# Altium PCB PCB3.PcbDoc (part 4 of 4)
Units mm, origin at the board's own origin, x right, y up, seen from the top; angles counter-clockwise.
Board outline 130 x 71 mm, 4 copper layers (Top Layer, Mid Layer 1, Mid Layer 2, Bottom Layer), stack 1.57 mm thick; 325 components, 359 nets, 1545 pads, 1046 vias.
Unrouted connection lines stored in the file: 158.
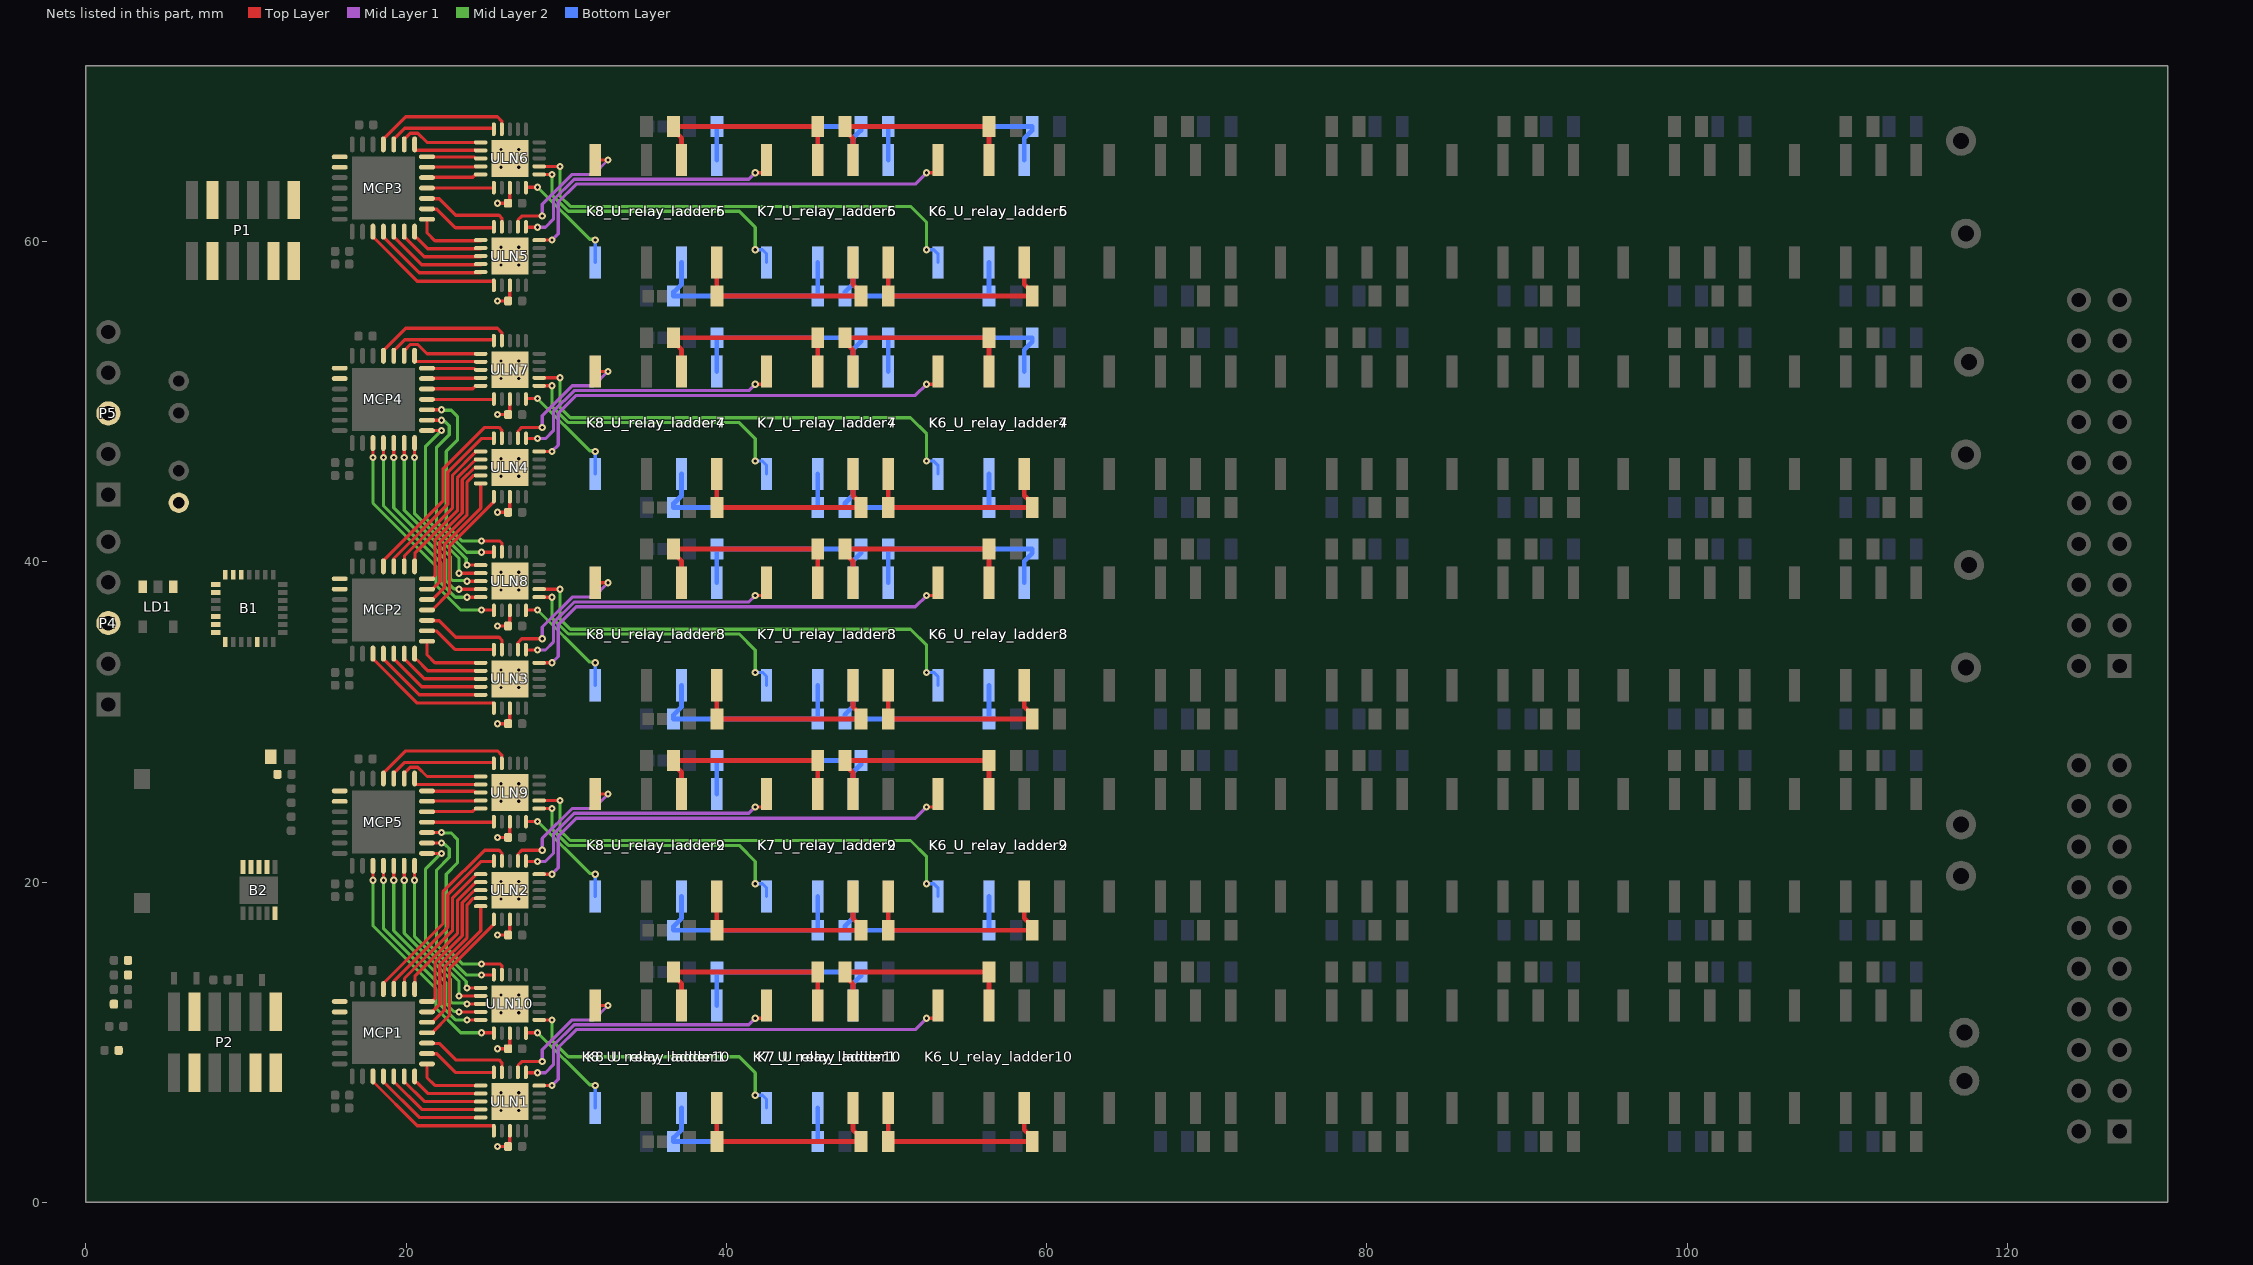
[diagram p6: the nets of this part, all layers, seen from the top]

## Via types
v1: diameter 0.45, hole 0.2, Top Layer to Bottom Layer, 944 vias
v2: diameter 0.5, hole 0.2, Top Layer to Bottom Layer, 85 vias
v3: diameter 0.5, hole 0.25, Top Layer to Bottom Layer, 10 vias
v4: diameter 0.8, hole 0.4, Top Layer to Bottom Layer, 5 vias
v5: diameter 5.5, hole 3, Top Layer to Bottom Layer, 2 vias

## Nets (pads, with @x,y where several pads share a name; then routed paths per layer and width w, separated by ;. In a path a pad name is that pad's centre, name@x,y a point inside that pad or via, vN(x,y) a via of type N, cw(c..) or ccw(c..) an arc to the next point about the centre after c; other vN are vias at no path point) (continued)
NetK6_U_relay_ladder2_7: K6_U_relay_ladder2.7 K7_U_relay_ladder2.6 R18_U_relay_ladder2.2 R19_U_relay_ladder2.1 | length 13.4
  Bottom Layer w0.3: K7_U_relay_ladder2.6@47.9,19.1 47.9,17.75 47.4,17.25 R19_U_relay_ladder2.1@47.4,17 56.4,17 56.402,17.001 56.402,19.098 K6_U_relay_ladder2.7@56.403,19.1
NetK6_U_relay_ladder2_8: K6_U_relay_ladder2.8 ULN9.12 | length 29.8
  Top Layer w0.2: ULN9.12@28.3,25.1 v1(29.6,25.1)
  Mid Layer 2 w0.2: v1(29.6,25.1) 29.6,23.253 30.251,22.602 51.494,22.602 52.5,21.596 v1(52.5,19.9)
  Bottom Layer w0.2: v1(52.5,19.9) 52.953,19.9 53.203,19.65 K6_U_relay_ladder2.8@53.203,19.1
NetK6_U_relay_ladder3_3: K6_U_relay_ladder3.3 K7_U_relay_ladder3.4 R10_U_relay_ladder3.2 R11_U_relay_ladder3.1 | length 13.4
  Bottom Layer w0.3: K7_U_relay_ladder3.4@50.098,38.7 50.099,38.701 R11_U_relay_ladder3.1@50.1,40.8 R11_U_relay_ladder3.1@50.1,40.8 59.1,40.8 59.1,40.55 58.6,40.05 K6_U_relay_ladder3.3@58.6,38.7
NetK6_U_relay_ladder3_7: K6_U_relay_ladder3.7 K7_U_relay_ladder3.6 R18_U_relay_ladder3.2 R19_U_relay_ladder3.1 | length 13.4
  Bottom Layer w0.3: K7_U_relay_ladder3.6@47.9,32.3 47.9,30.95 47.4,30.45 R19_U_relay_ladder3.1@47.4,30.2 56.4,30.2 56.402,30.201 56.402,32.298 K6_U_relay_ladder3.7@56.403,32.3
NetK6_U_relay_ladder3_8: K6_U_relay_ladder3.8 ULN8.12 | length 29.8
  Top Layer w0.2: ULN8.12@28.3,38.3 v1(29.6,38.3)
  Mid Layer 2 w0.2: v1(29.6,38.3) 29.6,36.453 30.251,35.802 51.494,35.802 52.5,34.796 v1(52.5,33.1)
  Bottom Layer w0.2: v1(52.5,33.1) 52.953,33.1 53.203,32.85 K6_U_relay_ladder3.8@53.203,32.3
NetK6_U_relay_ladder4_3: K6_U_relay_ladder4.3 K7_U_relay_ladder4.4 R10_U_relay_ladder4.2 R11_U_relay_ladder4.1 | length 13.4
  Bottom Layer w0.3: K7_U_relay_ladder4.4@50.097,51.9 50.099,51.901 50.099,53.998 R11_U_relay_ladder4.1@50.1,54 59.1,54 59.1,53.75 58.6,53.25 K6_U_relay_ladder4.3@58.6,51.9
NetK6_U_relay_ladder4_7: K6_U_relay_ladder4.7 K7_U_relay_ladder4.6 R18_U_relay_ladder4.2 R19_U_relay_ladder4.1 | length 13.4
  Bottom Layer w0.3: K7_U_relay_ladder4.6@47.9,45.5 47.9,44.15 47.4,43.65 R19_U_relay_ladder4.1@47.4,43.4 56.4,43.4 56.402,43.401 56.402,45.498 K6_U_relay_ladder4.7@56.403,45.5
NetK6_U_relay_ladder4_8: K6_U_relay_ladder4.8 ULN7.12 | length 29.8
  Top Layer w0.2: ULN7.12@28.3,51.5 v1(29.6,51.5)
  Mid Layer 2 w0.2: v1(29.6,51.5) 29.6,49.653 30.251,49.002 51.494,49.002 52.5,47.996 v1(52.5,46.3)
  Bottom Layer w0.2: v1(52.5,46.3) 52.953,46.3 53.203,46.05 K6_U_relay_ladder4.8@53.203,45.5
NetK6_U_relay_ladder5_3: K6_U_relay_ladder5.3 K7_U_relay_ladder5.4 R10_U_relay_ladder5.2 R11_U_relay_ladder5.1 | length 13.4
  Bottom Layer w0.3: K7_U_relay_ladder5.4@50.097,65.1 50.099,65.101 50.099,67.198 R11_U_relay_ladder5.1@50.1,67.2 59.1,67.2 59.1,66.95 58.6,66.45 K6_U_relay_ladder5.3@58.6,65.1
NetK6_U_relay_ladder5_7: K6_U_relay_ladder5.7 K7_U_relay_ladder5.6 R18_U_relay_ladder5.2 R19_U_relay_ladder5.1 | length 13.4
  Bottom Layer w0.3: K7_U_relay_ladder5.6@47.9,58.7 47.9,57.35 47.4,56.85 R19_U_relay_ladder5.1@47.4,56.6 56.4,56.6 56.402,56.601 56.402,58.698 K6_U_relay_ladder5.7@56.403,58.7
NetK6_U_relay_ladder5_8: K6_U_relay_ladder5.8 ULN6.12 | length 29.8
  Top Layer w0.2: ULN6.12@28.3,64.7 v1(29.6,64.7)
  Mid Layer 2 w0.2: v1(29.6,64.7) 29.6,62.853 30.251,62.202 51.494,62.202 52.5,61.196 v1(52.5,59.5)
  Bottom Layer w0.2: v1(52.5,59.5) 52.953,59.5 53.203,59.25 K6_U_relay_ladder5.8@53.203,58.7
NetK6_U_relay_ladder6_3: K6_U_relay_ladder6.3 K7_U_relay_ladder6.4 R10_U_relay_ladder6.2 R11_U_relay_ladder6.1 | length 13.4
  Top Layer w0.3: K7_U_relay_ladder6.4@50.097,58.7 50.099,58.698 R11_U_relay_ladder6.1@50.1,56.6 R11_U_relay_ladder6.1@50.1,56.6 59.1,56.6 59.1,56.85 58.6,57.35 K6_U_relay_ladder6.3@58.6,58.7
NetK6_U_relay_ladder6_7: K6_U_relay_ladder6.7 K7_U_relay_ladder6.6 R18_U_relay_ladder6.2 R19_U_relay_ladder6.1 | length 13.4
  Top Layer w0.3: K7_U_relay_ladder6.6@47.9,65.1 47.9,66.45 47.4,66.95 R19_U_relay_ladder6.1@47.4,67.2 56.4,67.2 56.402,67.198 56.402,65.102 K6_U_relay_ladder6.7@56.403,65.1
NetK6_U_relay_ladder6_8: K6_U_relay_ladder6.8 ULN5.15 | length 28.5
  Top Layer w0.2: ULN5.15@28.3,60.1 v1(29.1,60.1) ; v1(52.5,64.3) 52.953,64.3 53.203,64.55 K6_U_relay_ladder6.8@53.203,65.1
  Mid Layer 1 w0.2: v1(29.1,60.1) 29.497,60.497 29.497,62.479 30.616,63.598 51.798,63.598 v1(52.5,64.3)
NetK6_U_relay_ladder7_3: K6_U_relay_ladder7.3 K7_U_relay_ladder7.4 R10_U_relay_ladder7.2 R11_U_relay_ladder7.1 | length 13.4
  Top Layer w0.3: K7_U_relay_ladder7.4@50.097,45.5 50.099,45.498 R11_U_relay_ladder7.1@50.1,43.4 R11_U_relay_ladder7.1@50.1,43.4 59.1,43.4 59.1,43.65 58.6,44.15 K6_U_relay_ladder7.3@58.6,45.5
NetK6_U_relay_ladder7_7: K6_U_relay_ladder7.7 K7_U_relay_ladder7.6 R18_U_relay_ladder7.2 R19_U_relay_ladder7.1 | length 13.4
  Top Layer w0.3: K7_U_relay_ladder7.6@47.9,51.9 47.9,53.25 47.4,53.75 R19_U_relay_ladder7.1@47.4,54 56.4,54 56.402,53.998 56.402,51.902 K6_U_relay_ladder7.7@56.403,51.9
NetK6_U_relay_ladder7_8: K6_U_relay_ladder7.8 ULN4.15 | length 28.5
  Top Layer w0.2: ULN4.15@28.3,46.9 v1(29.1,46.9) ; v1(52.5,51.1) 52.953,51.1 53.203,51.35 K6_U_relay_ladder7.8@53.203,51.9
  Mid Layer 1 w0.2: v1(29.1,46.9) 29.497,47.297 29.497,49.279 30.616,50.398 51.798,50.398 v1(52.5,51.1)
NetK6_U_relay_ladder8_3: K6_U_relay_ladder8.3 K7_U_relay_ladder8.4 R10_U_relay_ladder8.2 R11_U_relay_ladder8.1 | length 13.4
  Top Layer w0.3: K7_U_relay_ladder8.4@50.097,32.3 50.099,32.298 50.099,30.202 R11_U_relay_ladder8.1@50.1,30.2 59.1,30.2 59.1,30.45 58.6,30.95 K6_U_relay_ladder8.3@58.6,32.3
NetK6_U_relay_ladder8_7: K6_U_relay_ladder8.7 K7_U_relay_ladder8.6 R18_U_relay_ladder8.2 R19_U_relay_ladder8.1 | length 13.4
  Top Layer w0.3: K7_U_relay_ladder8.6@47.9,38.7 47.9,40.05 47.4,40.55 R19_U_relay_ladder8.1@47.4,40.8 56.4,40.8 56.402,40.798 56.402,38.702 K6_U_relay_ladder8.7@56.403,38.7
NetK6_U_relay_ladder8_8: K6_U_relay_ladder8.8 ULN3.15 | length 28.5
  Top Layer w0.2: ULN3.15@28.3,33.7 v1(29.1,33.7) ; v1(52.5,37.9) 52.953,37.9 53.203,38.15 K6_U_relay_ladder8.8@53.203,38.7
  Mid Layer 1 w0.2: v1(29.1,33.7) 29.497,34.097 29.497,36.079 30.616,37.198 51.798,37.198 v1(52.5,37.9)
NetK6_U_relay_ladder9_3: K6_U_relay_ladder9.3 K7_U_relay_ladder9.4 R10_U_relay_ladder9.2 R11_U_relay_ladder9.1 | length 13.4
  Top Layer w0.3: K7_U_relay_ladder9.4@50.097,19.1 50.099,19.098 50.099,17.002 R11_U_relay_ladder9.1@50.1,17 59.1,17 59.1,17.25 58.6,17.75 K6_U_relay_ladder9.3@58.6,19.1
NetK6_U_relay_ladder9_7: K6_U_relay_ladder9.7 K7_U_relay_ladder9.6 R18_U_relay_ladder9.2 R19_U_relay_ladder9.1 | length 13.4
  Top Layer w0.3: K7_U_relay_ladder9.6@47.9,25.5 47.9,26.85 47.4,27.35 R19_U_relay_ladder9.1@47.4,27.6 56.4,27.6 56.402,27.598 56.402,25.502 K6_U_relay_ladder9.7@56.403,25.5
NetK6_U_relay_ladder9_8: K6_U_relay_ladder9.8 ULN2.15 | length 28.5
  Top Layer w0.2: ULN2.15@28.3,20.5 v1(29.1,20.5) ; v1(52.5,24.7) 52.953,24.7 53.203,24.95 K6_U_relay_ladder9.8@53.203,25.5
  Mid Layer 1 w0.2: v1(29.1,20.5) 29.497,20.897 29.497,22.879 30.616,23.998 51.798,23.998 v1(52.5,24.7)
NetK6_U_relay_ladder10_3: K6_U_relay_ladder10.3 K7_U_relay_ladder10.4 R10_U_relay_ladder10.2 R11_U_relay_ladder10.1 | length 13.4
  Top Layer w0.3: K7_U_relay_ladder10.4@50.097,5.9 50.099,5.898 50.099,3.802 R11_U_relay_ladder10.1@50.1,3.8 59.1,3.8 59.1,4.05 58.6,4.55 K6_U_relay_ladder10.3@58.6,5.9
NetK6_U_relay_ladder10_7: K6_U_relay_ladder10.7 K7_U_relay_ladder10.6 R18_U_relay_ladder10.2 R19_U_relay_ladder10.1 | length 13.4
  Top Layer w0.3: K7_U_relay_ladder10.6@47.9,12.3 47.9,13.65 47.4,14.15 47.4,14.4 56.4,14.4 56.402,14.398 56.402,12.302 K6_U_relay_ladder10.7@56.403,12.3
NetK6_U_relay_ladder10_8: K6_U_relay_ladder10.8 ULN1.15 | length 28.5
  Top Layer w0.2: ULN1.15@28.3,7.3 v1(29.1,7.3) ; v1(52.5,11.5) 52.953,11.5 53.203,11.75 K6_U_relay_ladder10.8@53.203,12.3
  Mid Layer 1 w0.2: v1(29.1,7.3) 29.497,7.697 29.497,9.679 30.616,10.798 51.798,10.798 v1(52.5,11.5)
NetK7_U_relay_ladder1_3: K7_U_relay_ladder1.3 K8_U_relay_ladder1.4 R11_U_relay_ladder1.2 R12_U_relay_ladder1.1 | length 13.4
  Bottom Layer w0.3: K8_U_relay_ladder1.4@39.397,12.3 K8_U_relay_ladder1.4@39.397,12.3 39.399,14.398 39.4,14.4 48.4,14.4 48.4,14.15 47.9,13.65 K7_U_relay_ladder1.3@47.9,12.3
NetK7_U_relay_ladder1_7: K7_U_relay_ladder1.7 K8_U_relay_ladder1.6 R19_U_relay_ladder1.2 R20_U_relay_ladder1.1 | length 13.4
  Bottom Layer w0.3: K8_U_relay_ladder1.6@37.2,5.9 37.2,4.55 36.7,4.05 R20_U_relay_ladder1.1@36.7,3.8 R19_U_relay_ladder1.2@45.7,3.8 45.702,3.801 45.702,5.898 K7_U_relay_ladder1.7@45.703,5.9
NetK7_U_relay_ladder1_8: K7_U_relay_ladder1.8 ULN10.11 | length 18.4
  Top Layer w0.2: ULN10.11@28.3,11.4 v1(29.1,11.4)
  Mid Layer 2 w0.2: v1(29.1,11.4) 29.1,10.127 30.127,9.1 40.794,9.1 41.8,8.094 v1(41.8,6.7)
  Bottom Layer w0.2: v1(41.8,6.7) 42.253,6.7 42.503,6.45 K7_U_relay_ladder1.8@42.503,5.9
NetK7_U_relay_ladder2_3: K7_U_relay_ladder2.3 K8_U_relay_ladder2.4 R11_U_relay_ladder2.2 R12_U_relay_ladder2.1 | length 13.4
  Bottom Layer w0.3: K8_U_relay_ladder2.4@39.397,25.5 K8_U_relay_ladder2.4@39.397,25.5 39.399,27.598 R12_U_relay_ladder2.1@39.4,27.6 R11_U_relay_ladder2.2@48.4,27.6 48.4,27.35 47.9,26.85 K7_U_relay_ladder2.3@47.9,25.5
NetK7_U_relay_ladder2_7: K7_U_relay_ladder2.7 K8_U_relay_ladder2.6 R19_U_relay_ladder2.2 R20_U_relay_ladder2.1 | length 13.4
  Bottom Layer w0.3: K8_U_relay_ladder2.6@37.2,19.1 37.2,17.75 36.7,17.25 R20_U_relay_ladder2.1@36.7,17 R19_U_relay_ladder2.2@45.7,17 45.702,17.001 45.702,19.098 K7_U_relay_ladder2.7@45.703,19.1
NetK7_U_relay_ladder2_8: K7_U_relay_ladder2.8 ULN9.11 | length 18.4
  Top Layer w0.2: ULN9.11@28.3,24.6 v1(29.1,24.6)
  Mid Layer 2 w0.2: v1(29.1,24.6) 29.1,23.327 30.127,22.3 40.794,22.3 41.8,21.294 v1(41.8,19.9)
  Bottom Layer w0.2: v1(41.8,19.9) 42.253,19.9 42.503,19.65 K7_U_relay_ladder2.8@42.503,19.1
NetK7_U_relay_ladder3_3: K7_U_relay_ladder3.3 K8_U_relay_ladder3.4 R11_U_relay_ladder3.2 R12_U_relay_ladder3.1 | length 13.4
  Bottom Layer w0.3: K8_U_relay_ladder3.4@39.398,38.7 K8_U_relay_ladder3.4@39.397,38.7 39.399,40.798 R12_U_relay_ladder3.1@39.4,40.8 R11_U_relay_ladder3.2@48.4,40.8 48.4,40.55 47.9,40.05 K7_U_relay_ladder3.3@47.9,38.7
NetK7_U_relay_ladder3_7: K7_U_relay_ladder3.7 K8_U_relay_ladder3.6 R19_U_relay_ladder3.2 R20_U_relay_ladder3.1 | length 13.4
  Bottom Layer w0.3: K8_U_relay_ladder3.6@37.2,32.3 37.2,30.95 36.7,30.45 R20_U_relay_ladder3.1@36.7,30.2 R19_U_relay_ladder3.2@45.7,30.2 45.702,30.201 45.702,32.298 K7_U_relay_ladder3.7@45.703,32.3
NetK7_U_relay_ladder3_8: K7_U_relay_ladder3.8 ULN8.11 | length 18.4
  Top Layer w0.2: ULN8.11@28.3,37.8 v1(29.1,37.8)
  Mid Layer 2 w0.2: v1(29.1,37.8) 29.1,36.527 30.127,35.5 40.794,35.5 41.8,34.494 v1(41.8,33.1)
  Bottom Layer w0.2: v1(41.8,33.1) 42.253,33.1 42.503,32.85 K7_U_relay_ladder3.8@42.503,32.3
NetK7_U_relay_ladder4_3: K7_U_relay_ladder4.3 K8_U_relay_ladder4.4 R11_U_relay_ladder4.2 R12_U_relay_ladder4.1 | length 13.4
  Bottom Layer w0.3: K8_U_relay_ladder4.4@39.397,51.9 39.399,51.901 39.399,53.998 R12_U_relay_ladder4.1@39.4,54 R11_U_relay_ladder4.2@48.4,54 48.4,53.75 47.9,53.25 K7_U_relay_ladder4.3@47.9,51.9
NetK7_U_relay_ladder4_7: K7_U_relay_ladder4.7 K8_U_relay_ladder4.6 R19_U_relay_ladder4.2 R20_U_relay_ladder4.1 | length 13.4
  Bottom Layer w0.3: K8_U_relay_ladder4.6@37.2,45.5 37.2,44.15 36.7,43.65 R20_U_relay_ladder4.1@36.7,43.4 R19_U_relay_ladder4.2@45.7,43.4 45.702,43.401 K7_U_relay_ladder4.7@45.703,45.5 K7_U_relay_ladder4.7@45.703,45.5
NetK7_U_relay_ladder4_8: K7_U_relay_ladder4.8 ULN7.11 | length 18.4
  Top Layer w0.2: ULN7.11@28.3,51 v1(29.1,51)
  Mid Layer 2 w0.2: v1(29.1,51) 29.1,49.727 30.127,48.7 40.794,48.7 41.8,47.694 v1(41.8,46.3)
  Bottom Layer w0.2: v1(41.8,46.3) 42.253,46.3 42.503,46.05 K7_U_relay_ladder4.8@42.503,45.5
NetK7_U_relay_ladder5_3: K7_U_relay_ladder5.3 K8_U_relay_ladder5.4 R11_U_relay_ladder5.2 R12_U_relay_ladder5.1 | length 13.4
  Bottom Layer w0.3: K8_U_relay_ladder5.4@39.397,65.1 39.399,65.101 39.399,67.198 R12_U_relay_ladder5.1@39.4,67.2 R11_U_relay_ladder5.2@48.4,67.2 48.4,66.95 47.9,66.45 K7_U_relay_ladder5.3@47.9,65.1
NetK7_U_relay_ladder5_7: K7_U_relay_ladder5.7 K8_U_relay_ladder5.6 R19_U_relay_ladder5.2 R20_U_relay_ladder5.1 | length 13.4
  Bottom Layer w0.3: K8_U_relay_ladder5.6@37.2,58.7 37.2,57.35 36.7,56.85 R20_U_relay_ladder5.1@36.7,56.6 R19_U_relay_ladder5.2@45.7,56.6 45.702,56.601 K7_U_relay_ladder5.7@45.703,58.7 K7_U_relay_ladder5.7@45.703,58.7
NetK7_U_relay_ladder5_8: K7_U_relay_ladder5.8 ULN6.11 | length 18.4
  Top Layer w0.2: ULN6.11@28.3,64.2 v1(29.1,64.2)
  Mid Layer 2 w0.2: v1(29.1,64.2) 29.1,62.927 30.127,61.9 40.794,61.9 41.8,60.894 v1(41.8,59.5)
  Bottom Layer w0.2: v1(41.8,59.5) 42.253,59.5 42.503,59.25 K7_U_relay_ladder5.8@42.503,58.7
NetK7_U_relay_ladder6_3: K7_U_relay_ladder6.3 K8_U_relay_ladder6.4 R11_U_relay_ladder6.2 R12_U_relay_ladder6.1 | length 13.4
  Top Layer w0.3: K8_U_relay_ladder6.4@39.397,58.7 K8_U_relay_ladder6.4@39.397,58.7 39.399,56.602 R12_U_relay_ladder6.1@39.4,56.6 R11_U_relay_ladder6.2@48.4,56.6 48.4,56.85 47.9,57.35 K7_U_relay_ladder6.3@47.9,58.7
NetK7_U_relay_ladder6_7: K7_U_relay_ladder6.7 K8_U_relay_ladder6.6 R19_U_relay_ladder6.2 R20_U_relay_ladder6.1 | length 13.4
  Top Layer w0.3: K8_U_relay_ladder6.6@37.2,65.1 37.2,66.45 36.7,66.95 R20_U_relay_ladder6.1@36.7,67.2 R19_U_relay_ladder6.2@45.7,67.2 45.702,67.198 45.702,65.102 K7_U_relay_ladder6.7@45.703,65.1
NetK7_U_relay_ladder6_8: K7_U_relay_ladder6.8 ULN5.16 | length 17.8
  Top Layer w0.2: ULN5.16@27.475,60.925 ULN5.16@27.475,60.925 27.498,60.9 v1(28.2,60.9) ; v1(41.8,64.3) 42.253,64.3 42.503,64.55 K7_U_relay_ladder6.8@42.503,65.1
  Mid Layer 1 w0.2: v1(28.2,60.9) 28.7,60.9 29.195,61.395 29.195,62.604 30.491,63.9 41.4,63.9 v1(41.8,64.3)
NetK7_U_relay_ladder7_3: K7_U_relay_ladder7.3 K8_U_relay_ladder7.4 R11_U_relay_ladder7.2 R12_U_relay_ladder7.1 | length 13.4
  Top Layer w0.3: K8_U_relay_ladder7.4@39.397,45.5 K8_U_relay_ladder7.4@39.397,45.5 39.399,43.402 R12_U_relay_ladder7.1@39.4,43.4 R11_U_relay_ladder7.2@48.4,43.4 48.4,43.65 47.9,44.15 K7_U_relay_ladder7.3@47.9,45.5
NetK7_U_relay_ladder7_7: K7_U_relay_ladder7.7 K8_U_relay_ladder7.6 R19_U_relay_ladder7.2 R20_U_relay_ladder7.1 | length 13.4
  Top Layer w0.3: K8_U_relay_ladder7.6@37.2,51.9 37.2,53.25 36.7,53.75 R20_U_relay_ladder7.1@36.7,54 R19_U_relay_ladder7.2@45.7,54 45.702,53.998 45.702,51.902 K7_U_relay_ladder7.7@45.703,51.9
NetK7_U_relay_ladder7_8: K7_U_relay_ladder7.8 ULN4.16 | length 17.8
  Top Layer w0.2: ULN4.16@27.475,47.725 27.475,47.723 27.498,47.7 v1(28.2,47.7) ; v1(41.8,51.1) 42.253,51.1 42.503,51.35 K7_U_relay_ladder7.8@42.503,51.9
  Mid Layer 1 w0.2: v1(28.2,47.7) 28.7,47.7 29.195,48.195 29.195,49.404 30.491,50.7 41.4,50.7 v1(41.8,51.1)
NetK7_U_relay_ladder8_3: K7_U_relay_ladder8.3 K8_U_relay_ladder8.4 R11_U_relay_ladder8.2 R12_U_relay_ladder8.1 | length 13.4
  Top Layer w0.3: K8_U_relay_ladder8.4@39.397,32.3 39.399,32.298 39.399,30.202 R12_U_relay_ladder8.1@39.4,30.2 R11_U_relay_ladder8.2@48.4,30.2 48.4,30.45 47.9,30.95 K7_U_relay_ladder8.3@47.9,32.3
NetK7_U_relay_ladder8_7: K7_U_relay_ladder8.7 K8_U_relay_ladder8.6 R19_U_relay_ladder8.2 R20_U_relay_ladder8.1 | length 13.4
  Top Layer w0.3: K8_U_relay_ladder8.6@37.2,38.7 37.2,40.05 36.7,40.55 R20_U_relay_ladder8.1@36.7,40.8 R19_U_relay_ladder8.2@45.7,40.8 45.702,40.798 K7_U_relay_ladder8.7@45.703,38.7 K7_U_relay_ladder8.7@45.703,38.7
NetK7_U_relay_ladder8_8: K7_U_relay_ladder8.8 ULN3.16 | length 17.8
  Top Layer w0.2: ULN3.16@27.475,34.525 27.475,34.523 27.498,34.5 v1(28.2,34.5) ; v1(41.8,37.9) 42.253,37.9 42.503,38.15 K7_U_relay_ladder8.8@42.503,38.7
  Mid Layer 1 w0.2: v1(28.2,34.5) 28.7,34.5 29.195,34.995 29.195,36.204 30.491,37.5 41.4,37.5 v1(41.8,37.9)
NetK7_U_relay_ladder9_3: K7_U_relay_ladder9.3 K8_U_relay_ladder9.4 R11_U_relay_ladder9.2 R12_U_relay_ladder9.1 | length 13.4
  Top Layer w0.3: K8_U_relay_ladder9.4@39.397,19.1 39.399,19.098 39.399,17.002 R12_U_relay_ladder9.1@39.4,17 R11_U_relay_ladder9.2@48.4,17 48.4,17.25 47.9,17.75 K7_U_relay_ladder9.3@47.9,19.1
NetK7_U_relay_ladder9_7: K7_U_relay_ladder9.7 K8_U_relay_ladder9.6 R19_U_relay_ladder9.2 R20_U_relay_ladder9.1 | length 13.4
  Top Layer w0.3: K8_U_relay_ladder9.6@37.2,25.5 37.2,26.85 36.7,27.35 R20_U_relay_ladder9.1@36.7,27.6 R19_U_relay_ladder9.2@45.7,27.6 45.702,27.598 K7_U_relay_ladder9.7@45.703,25.5 K7_U_relay_ladder9.7@45.703,25.5
NetK7_U_relay_ladder9_8: K7_U_relay_ladder9.8 ULN2.16 | length 17.8
  Top Layer w0.2: ULN2.16@27.475,21.325 27.475,21.323 27.498,21.3 v1(28.2,21.3) ; v1(41.8,24.7) 42.253,24.7 42.503,24.95 K7_U_relay_ladder9.8@42.503,25.5
  Mid Layer 1 w0.2: v1(28.2,21.3) 28.7,21.3 29.195,21.795 29.195,23.004 30.491,24.3 41.4,24.3 v1(41.8,24.7)
NetK7_U_relay_ladder10_3: K7_U_relay_ladder10.3 K8_U_relay_ladder10.4 R11_U_relay_ladder10.2 R12_U_relay_ladder10.1 | length 13.4
  Top Layer w0.3: K8_U_relay_ladder10.4@39.397,5.9 39.399,5.898 39.399,3.802 R12_U_relay_ladder10.1@39.4,3.8 R11_U_relay_ladder10.2@48.4,3.8 48.4,4.05 47.9,4.55 K7_U_relay_ladder10.3@47.9,5.9
NetK7_U_relay_ladder10_7: K7_U_relay_ladder10.7 K8_U_relay_ladder10.6 R19_U_relay_ladder10.2 R20_U_relay_ladder10.1 | length 13.4
  Top Layer w0.3: K8_U_relay_ladder10.6@37.2,12.3 37.2,13.65 36.7,14.15 36.7,14.4 45.7,14.4 45.702,14.398 K7_U_relay_ladder10.7@45.703,12.3 K7_U_relay_ladder10.7@45.703,12.3
NetK7_U_relay_ladder10_8: K7_U_relay_ladder10.8 ULN1.16 | length 17.8
  Top Layer w0.2: ULN1.16@27.475,8.125 27.475,8.123 27.498,8.1 v1(28.2,8.1) ; v1(41.8,11.5) 42.253,11.5 42.503,11.75 K7_U_relay_ladder10.8@42.503,12.3
  Mid Layer 1 w0.2: v1(28.2,8.1) 28.7,8.1 29.195,8.595 29.195,9.804 30.491,11.1 41.4,11.1 v1(41.8,11.5)
NetK8_U_relay_ladder1_8: K8_U_relay_ladder1.8 ULN10.10 | length 7.1
  Top Layer w0.2: ULN10.10@27.475,10.575 ULN10.10@27.475,10.575 27.498,10.6 v1(28.2,10.6)
  Mid Layer 2 w0.2: v1(28.2,10.6) 31.452,7.348 31.752,7.348 v1(31.8,7.3)
  Bottom Layer w0.2: v1(31.8,7.3) 31.8,5.902 K8_U_relay_ladder1.8@31.803,5.9
NetK8_U_relay_ladder2_8: K8_U_relay_ladder2.8 ULN9.10 | length 7.1
  Top Layer w0.2: ULN9.10@27.475,23.775 27.475,23.777 27.498,23.8 v1(28.2,23.8)
  Mid Layer 2 w0.2: v1(28.2,23.8) 31.452,20.548 31.752,20.548 v1(31.8,20.5)
  Bottom Layer w0.2: v1(31.8,20.5) 31.8,19.102 K8_U_relay_ladder2.8@31.803,19.1
NetK8_U_relay_ladder3_8: K8_U_relay_ladder3.8 ULN8.10 | length 7.1
  Top Layer w0.2: ULN8.10@27.475,36.975 27.475,36.977 27.498,37 v1(28.2,37)
  Mid Layer 2 w0.2: v1(28.2,37) 31.452,33.748 31.752,33.748 v1(31.8,33.7)
  Bottom Layer w0.2: v1(31.8,33.7) 31.8,32.302 K8_U_relay_ladder3.8@31.803,32.3
NetK8_U_relay_ladder4_8: K8_U_relay_ladder4.8 ULN7.10 | length 7.1
  Top Layer w0.2: ULN7.10@27.475,50.175 27.475,50.177 27.498,50.2 v1(28.2,50.2)
  Mid Layer 2 w0.2: v1(28.2,50.2) 31.452,46.948 31.752,46.948 v1(31.8,46.9)
  Bottom Layer w0.2: v1(31.8,46.9) 31.8,45.502 K8_U_relay_ladder4.8@31.803,45.5
NetK8_U_relay_ladder5_8: K8_U_relay_ladder5.8 ULN6.10 | length 7.1
  Top Layer w0.2: ULN6.10@27.475,63.375 27.475,63.377 27.498,63.4 v1(28.2,63.4)
  Mid Layer 2 w0.2: v1(28.2,63.4) 31.452,60.148 31.752,60.148 v1(31.8,60.1)
  Bottom Layer w0.2: v1(31.8,60.1) 31.8,58.702 K8_U_relay_ladder5.8@31.803,58.7
NetK8_U_relay_ladder6_8: K8_U_relay_ladder6.8 ULN5.17 | length 8.8
  Top Layer w0.2: ULN5.17@26.975,60.925 26.985,60.935 26.985,61.362 27.222,61.6 v1(28.5,61.6) ; K8_U_relay_ladder6.8@31.803,65.1 v1(32.6,65.1)
  Mid Layer 1 w0.2: v1(28.5,61.6) 28.5,62.335 30.366,64.202 31.702,64.202 v1(32.6,65.1)
NetK8_U_relay_ladder7_8: K8_U_relay_ladder7.8 ULN4.17 | length 8.8
  Top Layer w0.2: ULN4.17@26.975,47.725 26.985,47.735 26.985,48.162 27.222,48.4 v1(28.5,48.4) ; K8_U_relay_ladder7.8@31.803,51.9 v1(32.6,51.9)
  Mid Layer 1 w0.2: v1(28.5,48.4) 28.5,49.135 30.366,51.002 31.702,51.002 v1(32.6,51.9)
NetK8_U_relay_ladder8_8: K8_U_relay_ladder8.8 ULN3.17 | length 8.8
  Top Layer w0.2: ULN3.17@26.975,34.525 26.985,34.535 26.985,34.962 27.222,35.2 v1(28.5,35.2) ; K8_U_relay_ladder8.8@31.803,38.7 v1(32.6,38.7)
  Mid Layer 1 w0.2: v1(28.5,35.2) 28.5,35.935 30.366,37.802 31.702,37.802 v1(32.6,38.7)
NetK8_U_relay_ladder9_8: K8_U_relay_ladder9.8 ULN2.17 | length 8.8
  Top Layer w0.2: ULN2.17@26.975,21.325 26.985,21.335 26.985,21.762 27.222,22 v1(28.5,22) ; K8_U_relay_ladder9.8@31.803,25.5 v1(32.6,25.5)
  Mid Layer 1 w0.2: v1(28.5,22) 28.5,22.735 30.366,24.602 31.702,24.602 v1(32.6,25.5)
NetK8_U_relay_ladder10_8: K8_U_relay_ladder10.8 ULN1.17 | length 8.8
  Top Layer w0.2: ULN1.17@26.975,8.125 26.985,8.135 26.985,8.562 27.222,8.8 v1(28.5,8.8) ; K8_U_relay_ladder10.8@31.803,12.3 v1(32.6,12.3)
  Mid Layer 1 w0.2: v1(28.5,8.8) 28.5,9.535 30.366,11.402 31.702,11.402 v1(32.6,12.3)
NetMCP1_1: MCP1.1 ULN2.2 | length 8.6
  Top Layer w0.2: MCP1.1@20.525,13.325 20.544,13.344 20.544,14.137 23.197,16.789 23.197,18.85 24.347,20 ULN2.2@24.65,20
NetMCP1_2: MCP1.2 ULN2.1 | length 9.3
  Top Layer w0.2: MCP1.2@19.875,13.325 19.894,13.344 19.894,13.994 22.895,16.995 22.895,19.032 24.364,20.5 ULN2.1@24.65,20.5
NetMCP1_3: MCP1.3 ULN2.20 | length 11
  Top Layer w0.2: MCP1.3@19.225,13.325 19.244,13.344 19.244,13.844 22.594,17.194 22.594,19.205 24.688,21.3 25.452,21.3 25.475,21.323 ULN2.20@25.475,21.325
NetMCP1_4: MCP1.4 ULN2.19 | length 12.9
  Top Layer w0.2: MCP1.4@18.575,13.325 18.575,13.675 22.292,17.392 22.292,19.392 24.9,22 25.8,22 25.974,21.826 ULN2.19@25.975,21.325
NetMCP1_17: MCP1.17 ULN1.6 | length 9.3
  Top Layer w0.2: MCP1.17@17.925,7.875 17.925,7.552 20.692,4.785 25.452,4.785 25.475,4.761 ULN1.6@25.475,4.475
NetMCP1_18: MCP1.18 ULN1.5 | length 7.3
  Top Layer w0.2: MCP1.18@18.575,7.875 18.575,7.552 20.817,5.31 24.64,5.31 ULN1.5@24.65,5.3
NetMCP1_19: MCP1.19 ULN1.4 | length 6.5
  Top Layer w0.2: MCP1.19@19.225,7.875 19.225,7.552 20.967,5.81 24.64,5.81 ULN1.4@24.65,5.8
NetMCP1_20: MCP1.20 ULN1.3 | length 5.6
  Top Layer w0.2: MCP1.20@19.875,7.875 19.875,7.552 21.117,6.31 24.64,6.31 ULN1.3@24.65,6.3
NetMCP1_21: MCP1.21 ULN1.2 | length 4.8
  Top Layer w0.2: MCP1.21@20.525,7.875 20.525,7.552 20.571,7.506 20.647,7.506 21.343,6.81 24.64,6.81 ULN1.2@24.65,6.8
NetMCP1_22: MCP1.22 ULN1.1 | length 4.7
  Top Layer w0.2: MCP1.22@21.593,8.604 21.547,8.65 MCP1.22@21.3,8.65 21.3,7.8 21.79,7.31 24.64,7.31 ULN1.1@24.65,7.3
NetMCP1_23: MCP1.23 ULN1.20 | length 4.7
  Top Layer w0.2: MCP1.23@21.3,9.3 21.319,9.281 21.919,9.281 23.075,8.125 ULN1.20@25.475,8.125
NetMCP1_24: MCP1.24 ULN1.19 | length 5.8
  Top Layer w0.2: MCP1.24@21.3,9.95 21.319,9.931 22.069,9.931 23.1,8.9 25.8,8.9 25.975,8.725 ULN1.19@25.975,8.125
NetMCP1_25: MCP1.25 ULN2.6 | length 9
  Top Layer w0.2: MCP1.25@21.3,10.6 21.623,10.6 22.7,11.677 22.7,14.586 25.475,17.361 ULN2.6@25.475,17.675
NetMCP1_26: MCP1.26 ULN2.5 | length 8.8
  Top Layer w0.2: MCP1.26@21.3,11.25 21.623,11.25 22.398,12.025 22.398,14.711 24.65,16.963 ULN2.5@24.65,18.5
NetMCP1_27: MCP1.27 ULN2.4 | length 8.9
  Top Layer w0.2: MCP1.27@21.3,11.9 21.623,11.9 22.097,12.374 22.097,14.836 23.8,16.54 23.8,18.6 24.19,18.99 24.64,18.99 ULN2.4@24.65,19
NetMCP1_28: MCP1.28 ULN2.3 | length 8.7
  Top Layer w0.2: MCP1.28@21.3,12.55 21.623,12.55 21.795,12.722 21.795,14.961 23.498,16.664 23.498,18.725 24.264,19.49 24.64,19.49 ULN2.3@24.65,19.5
NetMCP2_1: MCP2.1 ULN4.2 | length 8.6
  Top Layer w0.2: MCP2.1@20.525,39.725 20.544,39.744 20.544,40.537 23.197,43.189 23.197,45.25 24.347,46.4 ULN4.2@24.65,46.4
NetMCP2_2: MCP2.2 ULN4.1 | length 9.3
  Top Layer w0.2: MCP2.2@19.875,39.725 19.894,39.744 19.894,40.394 22.895,43.395 22.895,45.432 24.364,46.9 ULN4.1@24.65,46.9
NetMCP2_3: MCP2.3 ULN4.20 | length 11
  Top Layer w0.2: MCP2.3@19.225,39.725 19.244,39.744 19.244,40.244 22.594,43.594 22.594,45.605 24.688,47.7 25.452,47.7 25.475,47.723 ULN4.20@25.475,47.725
NetMCP2_4: MCP2.4 ULN4.19 | length 12.9
  Top Layer w0.2: MCP2.4@18.575,39.725 18.575,40.075 22.292,43.792 22.292,45.792 24.9,48.4 25.8,48.4 25.974,48.226 ULN4.19@25.975,47.725
NetMCP2_17: MCP2.17 ULN3.6 | length 9.3
  Top Layer w0.2: MCP2.17@17.925,34.275 17.925,33.952 20.692,31.185 25.452,31.185 25.475,31.161 ULN3.6@25.475,30.875
NetMCP2_18: MCP2.18 ULN3.5 | length 7.3
  Top Layer w0.2: MCP2.18@18.575,34.275 18.575,33.952 20.817,31.71 24.64,31.71 ULN3.5@24.65,31.7
NetMCP2_19: MCP2.19 ULN3.4 | length 6.5
  Top Layer w0.2: MCP2.19@19.225,34.275 19.225,33.952 20.967,32.21 24.64,32.21 ULN3.4@24.65,32.2
NetMCP2_20: MCP2.20 ULN3.3 | length 5.6
  Top Layer w0.2: MCP2.20@19.875,34.275 19.875,33.952 21.117,32.71 24.64,32.71 ULN3.3@24.65,32.7
NetMCP2_21: MCP2.21 ULN3.2 | length 4.8
  Top Layer w0.2: MCP2.21@20.525,34.275 20.525,33.952 20.571,33.906 20.647,33.906 21.343,33.21 24.64,33.21 ULN3.2@24.65,33.2
NetMCP2_22: MCP2.22 ULN3.1 | length 4.7
  Top Layer w0.2: MCP2.22@21.593,35.004 21.547,35.05 MCP2.22@21.3,35.05 21.3,34.2 21.79,33.71 24.64,33.71 ULN3.1@24.65,33.7
NetMCP2_23: MCP2.23 ULN3.20 | length 4.7
  Top Layer w0.2: MCP2.23@21.3,35.7 21.319,35.681 21.919,35.681 23.075,34.525 ULN3.20@25.475,34.525
NetMCP2_24: MCP2.24 ULN3.19 | length 5.8
  Top Layer w0.2: MCP2.24@21.3,36.35 21.319,36.331 22.069,36.331 23.1,35.3 25.8,35.3 25.975,35.125 ULN3.19@25.975,34.525
NetMCP2_25: MCP2.25 ULN4.6 | length 9
  Top Layer w0.2: MCP2.25@21.3,37 21.623,37 22.7,38.077 22.7,40.986 25.475,43.761 ULN4.6@25.475,44.075
NetMCP2_26: MCP2.26 ULN4.5 | length 8.8
  Top Layer w0.2: MCP2.26@21.3,37.65 21.623,37.65 22.398,38.425 22.398,41.111 24.65,43.363 ULN4.5@24.65,44.9
NetMCP2_27: MCP2.27 ULN4.4 | length 8.9
  Top Layer w0.2: MCP2.27@21.3,38.3 21.623,38.3 22.097,38.774 22.097,41.236 23.8,42.94 23.8,45 24.19,45.39 24.64,45.39 ULN4.4@24.65,45.4
NetMCP2_28: MCP2.28 ULN4.3 | length 8.7
  Top Layer w0.2: MCP2.28@21.3,38.95 21.623,38.95 21.795,39.122 21.795,41.361 23.498,43.064 23.498,45.125 24.264,45.89 24.64,45.89 ULN4.3@24.65,45.9
NetMCP3_1: MCP3.1 ULN6.2 | length 4.5
  Top Layer w0.2: MCP3.1@20.525,66.075 20.525,65.756 20.571,65.71 24.64,65.71 ULN6.2@24.65,65.7
NetMCP3_2: MCP3.2 ULN6.1 | length 5.5
  Top Layer w0.2: MCP3.2@19.875,66.075 19.875,66.398 20.254,66.777 20.723,66.777 21.3,66.2 ULN6.1@24.65,66.2
NetMCP3_3: MCP3.3 ULN6.20 | length 6.9
  Top Layer w0.2: MCP3.3@19.225,66.075 19.225,66.398 19.905,67.078 25.452,67.078 25.475,67.055 ULN6.20@25.475,67.025
NetMCP3_4: MCP3.4 ULN6.19 | length 8.9
  Top Layer w0.2: MCP3.4@18.575,66.075 18.575,66.398 19.977,67.8 25.7,67.8 25.974,67.526 ULN6.19@25.975,67.025
NetMCP3_17: MCP3.17 ULN5.6 | length 9.3
  Top Layer w0.2: MCP3.17@17.925,60.625 17.925,60.302 20.692,57.535 25.452,57.535 25.475,57.511 ULN5.6@25.475,57.225
NetMCP3_18: MCP3.18 ULN5.5 | length 7.3
  Top Layer w0.2: MCP3.18@18.575,60.625 18.575,60.302 20.817,58.06 24.64,58.06 ULN5.5@24.65,58.05
NetMCP3_19: MCP3.19 ULN5.4 | length 6.5
  Top Layer w0.2: MCP3.19@19.225,60.625 19.225,60.302 20.967,58.56 24.64,58.56 ULN5.4@24.65,58.55
NetMCP3_20: MCP3.20 ULN5.3 | length 5.6
  Top Layer w0.2: MCP3.20@19.875,60.625 19.875,60.302 21.117,59.06 24.64,59.06 ULN5.3@24.65,59.05
NetMCP3_21: MCP3.21 ULN5.2 | length 4.8
  Top Layer w0.2: MCP3.21@20.525,60.625 20.525,60.302 20.571,60.256 20.647,60.256 21.343,59.56 24.64,59.56 ULN5.2@24.65,59.55
NetMCP3_22: MCP3.22 ULN5.1 | length 4.7
  Top Layer w0.2: MCP3.22@21.593,61.354 21.547,61.4 MCP3.22@21.3,61.4 21.3,60.55 21.79,60.06 24.64,60.06 ULN5.1@24.65,60.05
NetMCP3_23: MCP3.23 ULN5.20 | length 4.7
  Top Layer w0.2: MCP3.23@21.3,62.05 21.319,62.031 21.919,62.031 23.075,60.875 ULN5.20@25.475,60.875
NetMCP3_24: MCP3.24 ULN5.19 | length 5.8
  Top Layer w0.2: MCP3.24@21.3,62.7 21.319,62.681 22.069,62.681 23.1,61.65 25.8,61.65 25.975,61.475 ULN5.19@25.975,60.875
NetMCP3_25: MCP3.25 ULN6.6 | length 4.2
  Top Layer w0.2: MCP3.25@21.3,63.35 25.452,63.35 25.475,63.373 ULN6.6@25.475,63.375
NetMCP3_26: MCP3.26 ULN6.5 | length 3.4
  Top Layer w0.2: MCP3.26@21.3,64 21.319,64.019 24.156,64.019 24.336,64.2 ULN6.5@24.65,64.2
NetMCP3_27: MCP3.27 ULN6.4 | length 3.4
  Top Layer w0.2: MCP3.27@21.3,64.65 21.319,64.669 24.306,64.669 24.336,64.7 ULN6.4@24.65,64.7
NetMCP3_28: MCP3.28 ULN6.3 | length 3.4
  Top Layer w0.2: MCP3.28@21.3,65.3 21.319,65.281 24.256,65.281 24.336,65.2 ULN6.3@24.65,65.2
R\E\S\E\T\: B1.5 P1.9 P2.9 R4.2
RGND: C14.2 C15.2 C16.2 C17.2 C18.2 C19.2 C26.2 C27.2 C28.2 C29.2 ULN1.8 ULN1.21 ULN2.8 ULN2.21 ULN3.8 ULN3.21 ULN4.8 ULN4.21 ULN5.8 ULN5.21 ULN6.8 ULN6.21 ULN7.8 ULN7.21 ULN8.8 ULN8.21 ULN9.8 ULN9.21 ULN10.8 ULN10.21 | length 16.8
  Top Layer w0.2: v1(25.7,3.5) C15.2@26.36,3.5 26.465,3.605 26.465,4.465 ULN1.8@26.475,4.475 ; v1(25.7,9.6) C16.2@26.36,9.6 26.465,9.705 26.465,10.565 ULN10.8@26.475,10.575 ; v1(25.7,16.7) C17.2@26.36,16.7 26.465,16.805 26.465,17.665 ULN2.8@26.475,17.675 ; v1(25.7,22.8) C26.2@26.36,22.8 26.465,22.905 26.465,23.765 ULN9.8@26.475,23.775 ; v1(25.7,29.9) C28.2@26.36,29.9 26.465,30.005 26.465,30.865 ULN3.8@26.475,30.875 ; v1(25.7,36) C29.2@26.36,36 26.465,36.105 26.465,36.965 ULN8.8@26.475,36.975 ; v1(25.7,43.1) C27.2@26.36,43.1 26.465,43.205 26.465,44.065 ULN4.8@26.475,44.075 ; v1(25.7,49.2) C14.2@26.36,49.2 26.465,49.305 26.465,50.165 ULN7.8@26.475,50.175 ; v1(25.7,56.3) C19.2@26.36,56.3 26.465,56.405 26.465,57.265 ULN5.8@26.475,57.275 ; v1(25.7,62.4) C18.2@26.36,62.4 26.465,62.505 26.465,63.365 ULN6.8@26.475,63.375
  other v2: 25.925,5.75 27.025,5.75 25.925,6.85 27.025,6.85 25.925,11.85 27.025,11.85 25.925,12.95 27.025,12.95 25.925,18.95 27.025,18.95 25.925,20.05 27.025,20.05 25.925,25.05 27.025,25.05 25.925,26.15 27.025,26.15 25.925,32.15 27.025,32.15 25.925,33.25 27.025,33.25 25.925,38.25 27.025,38.25 25.925,39.35 27.025,39.35 25.925,45.35 27.025,45.35 25.925,46.45 27.025,46.45 25.925,51.45 27.025,51.45 25.925,52.55 27.025,52.55 25.925,58.55 27.025,58.55 25.925,59.65 27.025,59.65 25.925,64.65 27.025,64.65 25.925,65.75 27.025,65.75
RS485_DE: B1.19 B2.3 B2.4
RS485_RX: B1.27 B2.2
RS485_TX: B1.26 B2.5
S\S\: B1.22 P1.4 P2.4
SCK: B1.23 P1.3 P2.3
SCL_DRV: B1.1 MCP1.8 MCP2.8 MCP3.8 MCP4.8 MCP5.8 R1.2
SDA_DRV: B1.28 MCP1.9 MCP2.9 MCP3.9 MCP4.9 MCP5.9 R2.2
SWCLK: B1.21 P1.12 P2.12
SWDIO: B1.20 P1.11 P2.11
ULN7_0: MCP4.25 ULN7.6 | length 4.2
  Top Layer w0.2: MCP4.25@21.3,50.15 25.452,50.15 25.475,50.173 ULN7.6@25.475,50.175
ULN7_1: MCP4.26 ULN7.5 | length 3.4
  Top Layer w0.2: MCP4.26@21.3,50.8 21.319,50.819 24.156,50.819 24.336,51 ULN7.5@24.65,51
ULN7_2: MCP4.27 ULN7.4 | length 3.4
  Top Layer w0.2: MCP4.27@21.3,51.45 21.319,51.469 24.306,51.469 24.336,51.5 ULN7.4@24.65,51.5
ULN7_3: MCP4.28 ULN7.3 | length 3.4
  Top Layer w0.2: MCP4.28@21.3,52.1 21.319,52.081 24.256,52.081 24.336,52 ULN7.3@24.65,52
ULN7_4: MCP4.1 ULN7.2 | length 4.5
  Top Layer w0.2: MCP4.1@20.525,52.875 20.525,52.556 20.571,52.51 24.64,52.51 ULN7.2@24.65,52.5
ULN7_5: MCP4.2 ULN7.1 | length 5.5
  Top Layer w0.2: MCP4.2@19.875,52.875 19.875,53.198 20.254,53.577 20.723,53.577 21.3,53 ULN7.1@24.65,53
ULN7_6: MCP4.3 ULN7.20 | length 6.9
  Top Layer w0.2: MCP4.3@19.225,52.875 19.225,53.198 19.905,53.878 25.452,53.878 25.475,53.855 ULN7.20@25.475,53.825
ULN7_7: MCP4.4 ULN7.19 | length 8.9
  Top Layer w0.2: MCP4.4@18.575,52.875 18.575,53.198 19.977,54.6 25.7,54.6 25.974,54.326 ULN7.19@25.975,53.825
ULN8_0: MCP4.17 ULN8.6 | length 14.8
  Top Layer w0.2: v1(17.925,46.525) MCP4.17@17.925,47.425 ; v1(24.7,37) 25.452,37 25.475,36.977 ULN8.6@25.475,36.975
  Mid Layer 2 w0.2: v1(17.925,46.525) 17.925,43.675 21.862,39.738 21.862,38.538 23.4,37 v1(24.7,37)
ULN8_1: MCP4.18 ULN8.5 | length 13.1
  Top Layer w0.2: v1@18.576,46.524 MCP4.18@18.575,47.425 ; v1(23.8,37.8) ULN8.5@24.65,37.8
  Mid Layer 2 w0.2: v1(18.576,46.523) 18.576,43.524 22.163,39.937 22.163,38.715 22.2,38.679 22.2,38.673 23.073,37.8 v1(23.8,37.8)
ULN8_2: MCP4.19 ULN8.4 | length 12.3
  Top Layer w0.2: v1(19.225,46.525) MCP4.19@19.225,47.425 ; v1(23.3,38.3) ULN8.4@24.65,38.3
  Mid Layer 2 w0.2: v1(19.225,46.525) 19.225,43.375 22.465,40.135 22.465,38.84 22.981,38.324 23.276,38.324 v1(23.3,38.3)
ULN8_3: MCP4.20 ULN8.3 | length 11.6
  Top Layer w0.2: MCP4.20@19.875,47.425 MCP4.20@19.875,47.425 v1(19.877,46.519) v1(19.877,46.519) ; v1(23.8,38.8) ULN8.3@24.65,38.8
  Mid Layer 2 w0.2: v1(19.877,46.519) 19.877,43.223 22.766,40.334 22.766,38.965 22.884,38.848 23.575,38.848 23.752,38.848 v1(23.8,38.8)
ULN8_4: MCP4.21 ULN8.2 | length 10.6
  Top Layer w0.2: v1(20.525,46.525) MCP4.21@20.525,47.425 ; v1(23.3,39.3) ULN8.2@24.65,39.3
  Mid Layer 2 w0.2: v1(20.525,46.525) 20.525,43.002 23.3,40.227 v1(23.3,39.3)
ULN8_5: MCP4.22 ULN8.1 | length 11.6
  Top Layer w0.2: MCP4.22@21.3,48.2 v1(22.2,48.2) ; v1(23.8,39.8) ULN8.1@24.65,39.8
  Mid Layer 2 w0.2: v1(22.2,48.2) 21.2,47.2 21.2,42.753 23.752,40.201 23.752,39.848 v1(23.8,39.8)
ULN8_6: MCP4.23 ULN8.20 | length 12.2
  Top Layer w0.2: MCP4.23@21.3,48.85 v1(22.2,48.85) ; v1(24.7,40.6) 25.452,40.6 ULN8.20@25.475,40.625 ULN8.20@25.475,40.625
  Mid Layer 2 w0.2: v1(22.2,48.85) 22.268,48.85 22.368,48.749 22.442,48.749 22.687,48.505 22.687,47.947 21.9,47.16 21.9,42.48 23.78,40.6 v1(24.7,40.6)
ULN8_7: MCP4.24 ULN8.19 | length 13.6
  Top Layer w0.2: MCP4.24@21.3,49.5 v1(22.2,49.5) ; v1(24.7,41.3) 25.858,41.3 25.975,41.183 ULN8.19@25.975,40.625
  Mid Layer 2 w0.2: v1(22.2,49.5) 22.225,49.475 22.812,49.475 23.2,49.087 23.2,47.6 22.5,46.9 22.5,42.306 23.506,41.3 v1(24.7,41.3)
ULN9_0: MCP5.25 ULN9.6 | length 4.2
  Top Layer w0.2: MCP5.25@21.3,23.75 25.452,23.75 ULN9.6@25.475,23.775 ULN9.6@25.475,23.775
ULN9_1: MCP5.26 ULN9.5 | length 3.4
  Top Layer w0.2: MCP5.26@21.3,24.4 21.319,24.419 24.156,24.419 24.336,24.6 ULN9.5@24.65,24.6
ULN9_2: MCP5.27 ULN9.4 | length 3.4
  Top Layer w0.2: MCP5.27@21.3,25.05 21.319,25.069 24.306,25.069 24.336,25.1 ULN9.4@24.65,25.1
ULN9_3: MCP5.28 ULN9.3 | length 3.4
  Top Layer w0.2: MCP5.28@21.3,25.7 21.319,25.681 24.256,25.681 24.336,25.6 ULN9.3@24.65,25.6
ULN9_4: MCP5.1 ULN9.2 | length 4.5
  Top Layer w0.2: MCP5.1@20.525,26.475 20.525,26.156 20.571,26.11 24.64,26.11 ULN9.2@24.65,26.1
ULN9_5: MCP5.2 ULN9.1 | length 5.5
  Top Layer w0.2: MCP5.2@19.875,26.475 19.875,26.798 20.254,27.177 20.723,27.177 21.3,26.6 ULN9.1@24.65,26.6
ULN9_6: MCP5.3 ULN9.20 | length 6.9
  Top Layer w0.2: MCP5.3@19.225,26.475 19.225,26.798 19.905,27.478 25.452,27.478 25.475,27.455 ULN9.20@25.475,27.425
ULN9_7: MCP5.4 ULN9.19 | length 8.9
  Top Layer w0.2: MCP5.4@18.575,26.475 18.575,26.798 19.977,28.2 25.7,28.2 25.974,27.926 ULN9.19@25.974,27.426
ULN10_0: MCP5.17 ULN10.6 | length 14.8
  Top Layer w0.2: v1(17.925,20.125) MCP5.17@17.925,21.025 ; v1(24.7,10.6) 25.452,10.6 ULN10.6@25.475,10.575 ULN10.6@25.475,10.575
  Mid Layer 2 w0.2: v1(17.925,20.125) 17.925,17.275 21.862,13.338 21.862,12.138 23.4,10.6 v1(24.7,10.6)
ULN10_1: MCP5.18 ULN10.5 | length 13.1
  Top Layer w0.2: v1(18.576,20.123) MCP5.18@18.575,21.025 ; v1(23.8,11.4) ULN10.5@24.65,11.4
  Mid Layer 2 w0.2: v1(18.576,20.123) 18.576,17.124 22.163,13.537 22.163,12.315 22.2,12.279 22.2,12.273 23.073,11.4 v1(23.8,11.4)
ULN10_2: MCP5.19 ULN10.4 | length 12.3
  Top Layer w0.2: v1(19.225,20.125) MCP5.19@19.225,21.025 ; v1(23.3,11.9) ULN10.4@24.65,11.9
  Mid Layer 2 w0.2: v1(19.225,20.125) 19.225,16.975 22.465,13.735 22.465,12.44 22.981,11.924 23.276,11.924 v1(23.3,11.9)
ULN10_3: MCP5.20 ULN10.3 | length 11.6
  Top Layer w0.2: MCP5.20@19.875,21.025 19.876,21.024 v1(19.877,20.119) v1(19.877,20.119) ; v1(23.8,12.4) ULN10.3@24.65,12.4
  Mid Layer 2 w0.2: v1(19.877,20.119) 19.877,16.823 22.766,13.934 22.766,12.565 22.884,12.448 23.575,12.448 23.752,12.448 v1(23.8,12.4)
ULN10_4: MCP5.21 ULN10.2 | length 10.6
  Top Layer w0.2: v1(20.525,20.125) MCP5.21@20.525,21.025 ; v1(23.3,12.9) ULN10.2@24.65,12.9
  Mid Layer 2 w0.2: v1(20.525,20.125) 20.525,16.602 23.3,13.827 v1(23.3,12.9)
ULN10_5: MCP5.22 ULN10.1 | length 11.6
  Top Layer w0.2: MCP5.22@21.3,21.8 v1(22.2,21.8) ; v1(23.8,13.4) ULN10.1@24.65,13.4
  Mid Layer 2 w0.2: v1(22.2,21.8) 21.2,20.8 21.2,16.353 23.752,13.801 23.752,13.448 v1(23.8,13.4)
ULN10_6: MCP5.23 ULN10.20 | length 12.2
  Top Layer w0.2: MCP5.23@21.3,22.45 v1(22.2,22.45) ; v1(24.7,14.2) 25.452,14.2 25.475,14.223 ULN10.20@25.475,14.225
  Mid Layer 2 w0.2: v1(22.2,22.45) 22.268,22.45 22.368,22.349 22.442,22.349 22.687,22.105 22.687,21.547 21.9,20.76 21.9,16.08 23.78,14.2 v1(24.7,14.2)
ULN10_7: MCP5.24 ULN10.19 | length 13.6
  Top Layer w0.2: MCP5.24@21.3,23.1 v1(22.2,23.1) ; v1(24.7,14.9) 25.858,14.9 25.975,14.783 ULN10.19@25.975,14.225
  Mid Layer 2 w0.2: v1(22.2,23.1) 22.225,23.075 22.812,23.075 23.2,22.687 23.2,21.2 22.5,20.5 22.5,15.906 23.506,14.9 v1(24.7,14.9)
"VCC 5V": B2.10 C2.1 C8.1 C9.1 C21.1 LD1.1 LD1.3 P4.3 P5.3
pads on no net: B1.2 B1.8 B1.9 B1.10 B1.11 B1.12 B1.13 B1.14 B1.15 B1.16 B1.17 B1.18 B2.7 K1_U_relay_ladder1.2 K1_U_relay_ladder1.5 K1_U_relay_ladder2.2 K1_U_relay_ladder2.5 K1_U_relay_ladder3.2 K1_U_relay_ladder3.5 K1_U_relay_ladder4.2 K1_U_relay_ladder4.5 K1_U_relay_ladder5.2 K1_U_relay_ladder5.5 K1_U_relay_ladder6.2 K1_U_relay_ladder6.5 K1_U_relay_ladder7.2 K1_U_relay_ladder7.5 K1_U_relay_ladder8.2 K1_U_relay_ladder8.5 K1_U_relay_ladder9.2 K1_U_relay_ladder9.5 K1_U_relay_ladder10.2 K1_U_relay_ladder10.5 K2_U_relay_ladder1.2 K2_U_relay_ladder1.5 K2_U_relay_ladder2.2 K2_U_relay_ladder2.5 K2_U_relay_ladder3.2 K2_U_relay_ladder3.5 K2_U_relay_ladder4.2 K2_U_relay_ladder4.5 K2_U_relay_ladder5.2 K2_U_relay_ladder5.5 K2_U_relay_ladder6.2 K2_U_relay_ladder6.5 K2_U_relay_ladder7.2 K2_U_relay_ladder7.5 K2_U_relay_ladder8.2 K2_U_relay_ladder8.5 K2_U_relay_ladder9.2 K2_U_relay_ladder9.5 K2_U_relay_ladder10.2 K2_U_relay_ladder10.5 K3_U_relay_ladder1.2 K3_U_relay_ladder1.5 K3_U_relay_ladder2.2 K3_U_relay_ladder2.5 K3_U_relay_ladder3.2 K3_U_relay_ladder3.5 K3_U_relay_ladder4.2 K3_U_relay_ladder4.5 K3_U_relay_ladder5.2 K3_U_relay_ladder5.5 K3_U_relay_ladder6.2 K3_U_relay_ladder6.5 K3_U_relay_ladder7.2 K3_U_relay_ladder7.5 K3_U_relay_ladder8.2 K3_U_relay_ladder8.5 K3_U_relay_ladder9.2 K3_U_relay_ladder9.5 K3_U_relay_ladder10.2 K3_U_relay_ladder10.5 K4_U_relay_ladder1.2 K4_U_relay_ladder1.5 K4_U_relay_ladder2.2 K4_U_relay_ladder2.5 K4_U_relay_ladder3.2 K4_U_relay_ladder3.5 K4_U_relay_ladder4.2 K4_U_relay_ladder4.5 K4_U_relay_ladder5.2 K4_U_relay_ladder5.5 K4_U_relay_ladder6.2 K4_U_relay_ladder6.5 K4_U_relay_ladder7.2 K4_U_relay_ladder7.5 K4_U_relay_ladder8.2 K4_U_relay_ladder8.5 K4_U_relay_ladder9.2 K4_U_relay_ladder9.5 K4_U_relay_ladder10.2 K4_U_relay_ladder10.5 K5_U_relay_ladder1.2 K5_U_relay_ladder1.5 K5_U_relay_ladder2.2 K5_U_relay_ladder2.5 K5_U_relay_ladder3.2 K5_U_relay_ladder3.5 K5_U_relay_ladder4.2 K5_U_relay_ladder4.5 K5_U_relay_ladder5.2 K5_U_relay_ladder5.5 K5_U_relay_ladder6.2 K5_U_relay_ladder6.5 K5_U_relay_ladder7.2 K5_U_relay_ladder7.5 K5_U_relay_ladder8.2 K5_U_relay_ladder8.5 K5_U_relay_ladder9.2 K5_U_relay_ladder9.5 K5_U_relay_ladder10.2 K5_U_relay_ladder10.5 K6_U_relay_ladder1.2 K6_U_relay_ladder1.5 K6_U_relay_ladder2.2 K6_U_relay_ladder2.5 K6_U_relay_ladder3.2 K6_U_relay_ladder3.5 K6_U_relay_ladder4.2 K6_U_relay_ladder4.5 K6_U_relay_ladder5.2 K6_U_relay_ladder5.5 K6_U_relay_ladder6.2 K6_U_relay_ladder6.5 K6_U_relay_ladder7.2 K6_U_relay_ladder7.5 K6_U_relay_ladder8.2 K6_U_relay_ladder8.5 K6_U_relay_ladder9.2 K6_U_relay_ladder9.5 K6_U_relay_ladder10.2 K6_U_relay_ladder10.5 K7_U_relay_ladder1.2 K7_U_relay_ladder1.5 K7_U_relay_ladder2.2 K7_U_relay_ladder2.5 K7_U_relay_ladder3.2 K7_U_relay_ladder3.5 K7_U_relay_ladder4.2 K7_U_relay_ladder4.5 K7_U_relay_ladder5.2 K7_U_relay_ladder5.5 K7_U_relay_ladder6.2 K7_U_relay_ladder6.5 K7_U_relay_ladder7.2 K7_U_relay_ladder7.5 K7_U_relay_ladder8.2 K7_U_relay_ladder8.5 K7_U_relay_ladder9.2 K7_U_relay_ladder9.5 K7_U_relay_ladder10.2 K7_U_relay_ladder10.5 K8_U_relay_ladder1.2 K8_U_relay_ladder1.5 K8_U_relay_ladder2.2 K8_U_relay_ladder2.5 K8_U_relay_ladder3.2 K8_U_relay_ladder3.5 K8_U_relay_ladder4.2 K8_U_relay_ladder4.5 K8_U_relay_ladder5.2 K8_U_relay_ladder5.5 K8_U_relay_ladder6.2 K8_U_relay_ladder6.5 K8_U_relay_ladder7.2 K8_U_relay_ladder7.5 K8_U_relay_ladder8.2 K8_U_relay_ladder8.5 K8_U_relay_ladder9.2 K8_U_relay_ladder9.5 K8_U_relay_ladder10.2 K8_U_relay_ladder10.5 LD1.4 MCP1.7 MCP1.10 MCP1.15 MCP1.16 MCP1.29 MCP2.7 MCP2.10 MCP2.15 MCP2.16 MCP2.29 MCP3.7 MCP3.10 MCP3.15 MCP3.16 MCP3.29 MCP4.7 MCP4.10 MCP4.15 MCP4.16 MCP4.29 MCP5.7 MCP5.10 MCP5.15 MCP5.16 MCP5.29 ULN1.7 ULN1.18 ULN2.7 ULN2.18 ULN3.7 ULN3.18 ULN4.7 ULN4.18 ULN5.7 ULN5.18 ULN6.7 ULN6.18 ULN7.7 ULN7.18 ULN8.7 ULN8.18 ULN9.7 ULN9.18 ULN10.7 ULN10.18
copper on no net:
  other v2: 17.475,9.5 18.575,9.5 19.675,9.5 17.475,10.6 18.575,10.6 19.675,10.6 17.475,11.7 18.575,11.7 19.675,11.7 17.475,22.65 18.575,22.65 19.675,22.65 17.475,23.75 18.575,23.75 19.675,23.75 17.475,24.85 18.575,24.85 19.675,24.85 17.475,35.9 18.575,35.9 19.675,35.9 17.475,37 18.575,37 19.675,37 17.475,38.1 18.575,38.1 19.675,38.1 17.475,49.05 18.575,49.05 19.675,49.05 17.475,50.15 18.575,50.15 19.675,50.15 17.475,51.25 18.575,51.25 19.675,51.25 17.475,62.25 18.575,62.25 19.675,62.25 17.475,63.35 18.575,63.35 19.675,63.35 17.475,64.45 18.575,64.45 19.675,64.45
  other v5: 5.2,3 3,68

## Polygon pours and split planes (outlines as drawn)
AGND on Top Layer "NONET_L-01_P-001" (solid, remove dead copper, shelved, pour order 0): 31.4,71.1 31.4,1.6 132.4,1.6 132.4,71.1
RGND on Mid Layer 2 "NONET_L-01_P-001" (solid, remove dead copper, shelved, pour order 2): 28.8,3.1 28.8,67.5 24.2,67.5 24.2,3.1

## Silkscreen, mask and mechanical layers (free items; w line width, h text height)
Mechanical 1:
  the board outline again, w0.2

## Text inside footprints (layer, text, board x,y; h text height)
C20: Top Overlay "+" at 6.5,53.1 h1.5 r90
C21: Top Overlay "+" at 5.1,41.9 h1.5 r270
P3: Top Overlay "1" at 127.508,1.9 h1.27 r90; Top Overlay "2" at 124.968,1.9 h1.27 r90
P6: Top Overlay "1" at 127.508,30.96 h1.27 r90; Top Overlay "2" at 124.968,30.96 h1.27 r90